# Altium PCB PCB_Func_Gen.PcbDoc
Units mm, origin at the board's own origin, x right, y up, seen from the top; angles counter-clockwise.
Board outline 91.44 x 110.49 mm, 2 copper layers (Top Layer, Bottom Layer); 54 components, 41 nets, 170 pads, 7 vias.
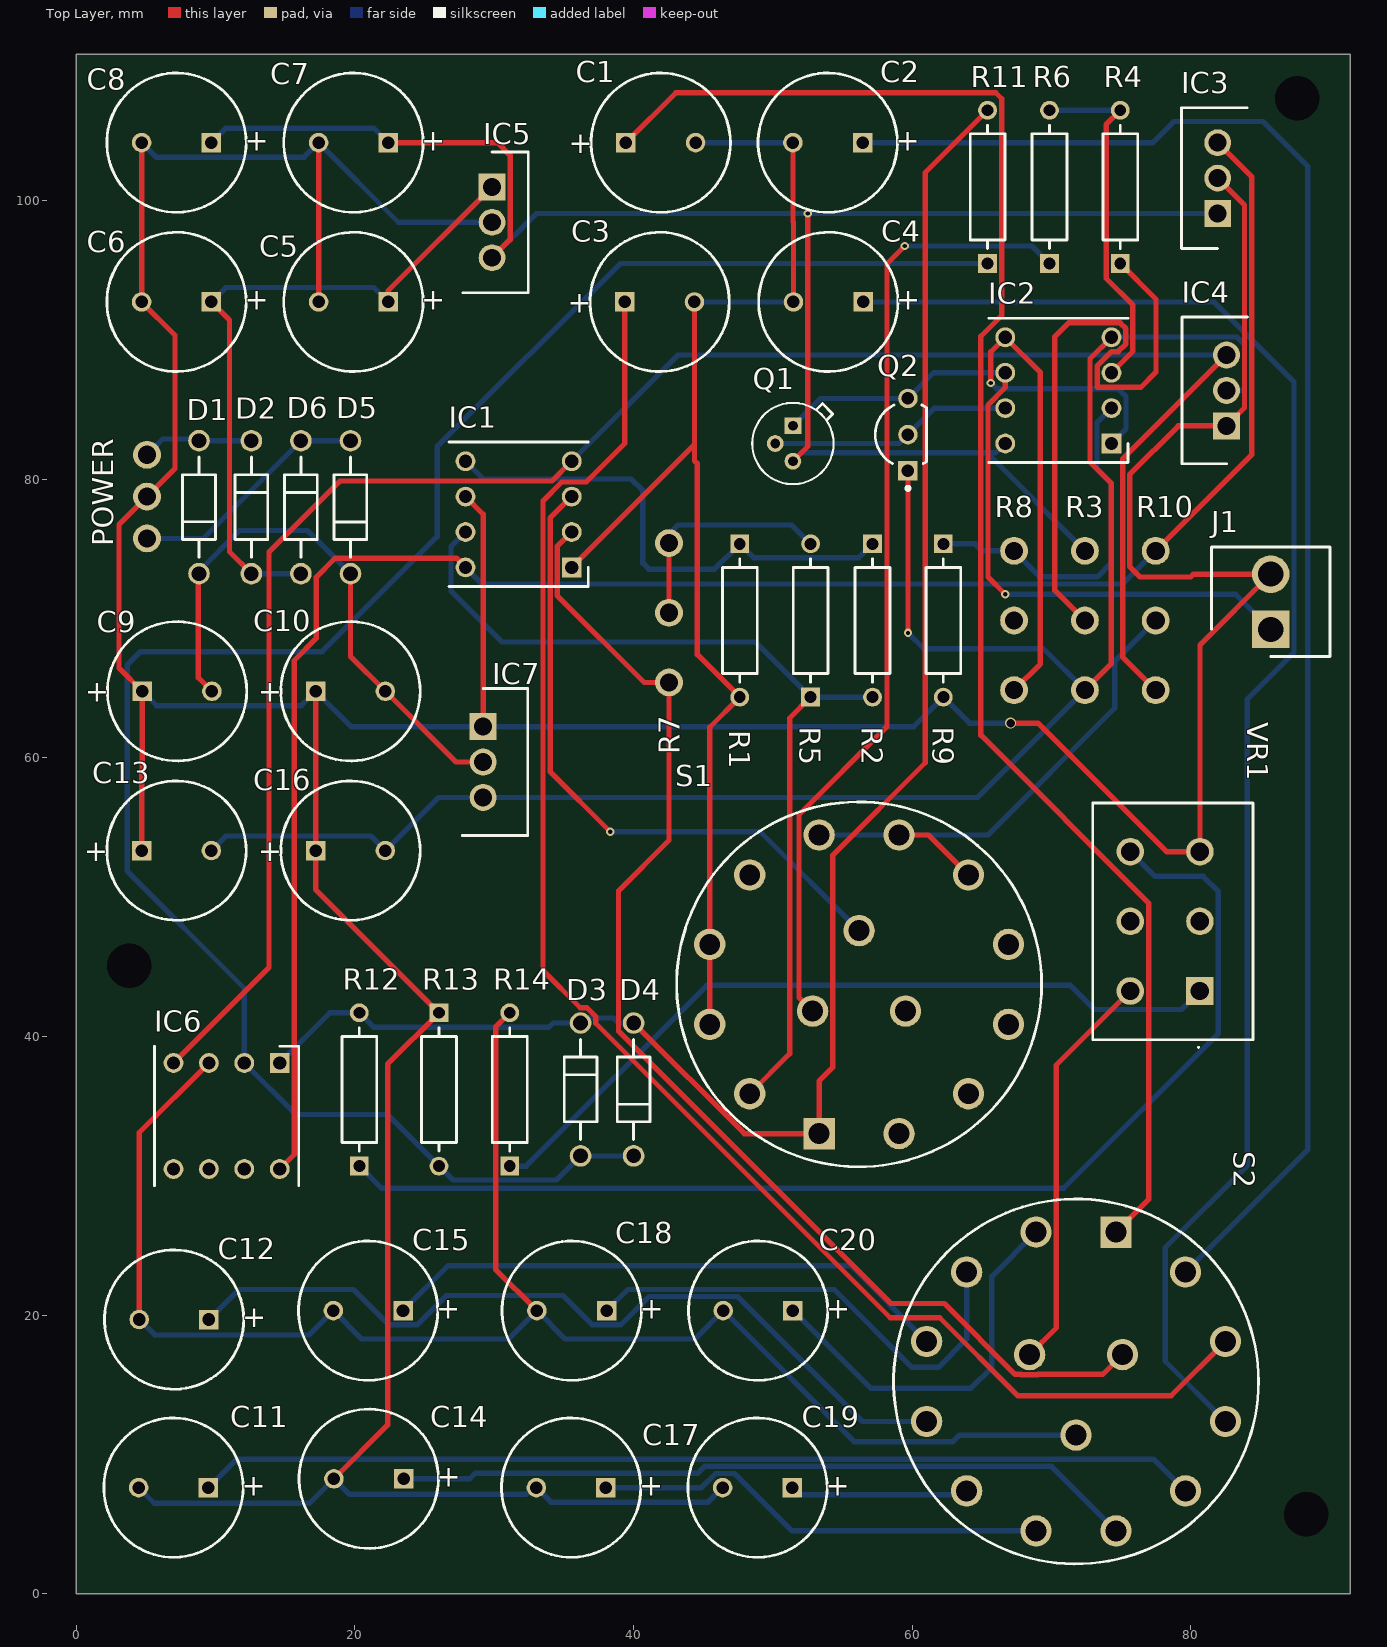
[diagram p0: Top Layer view]
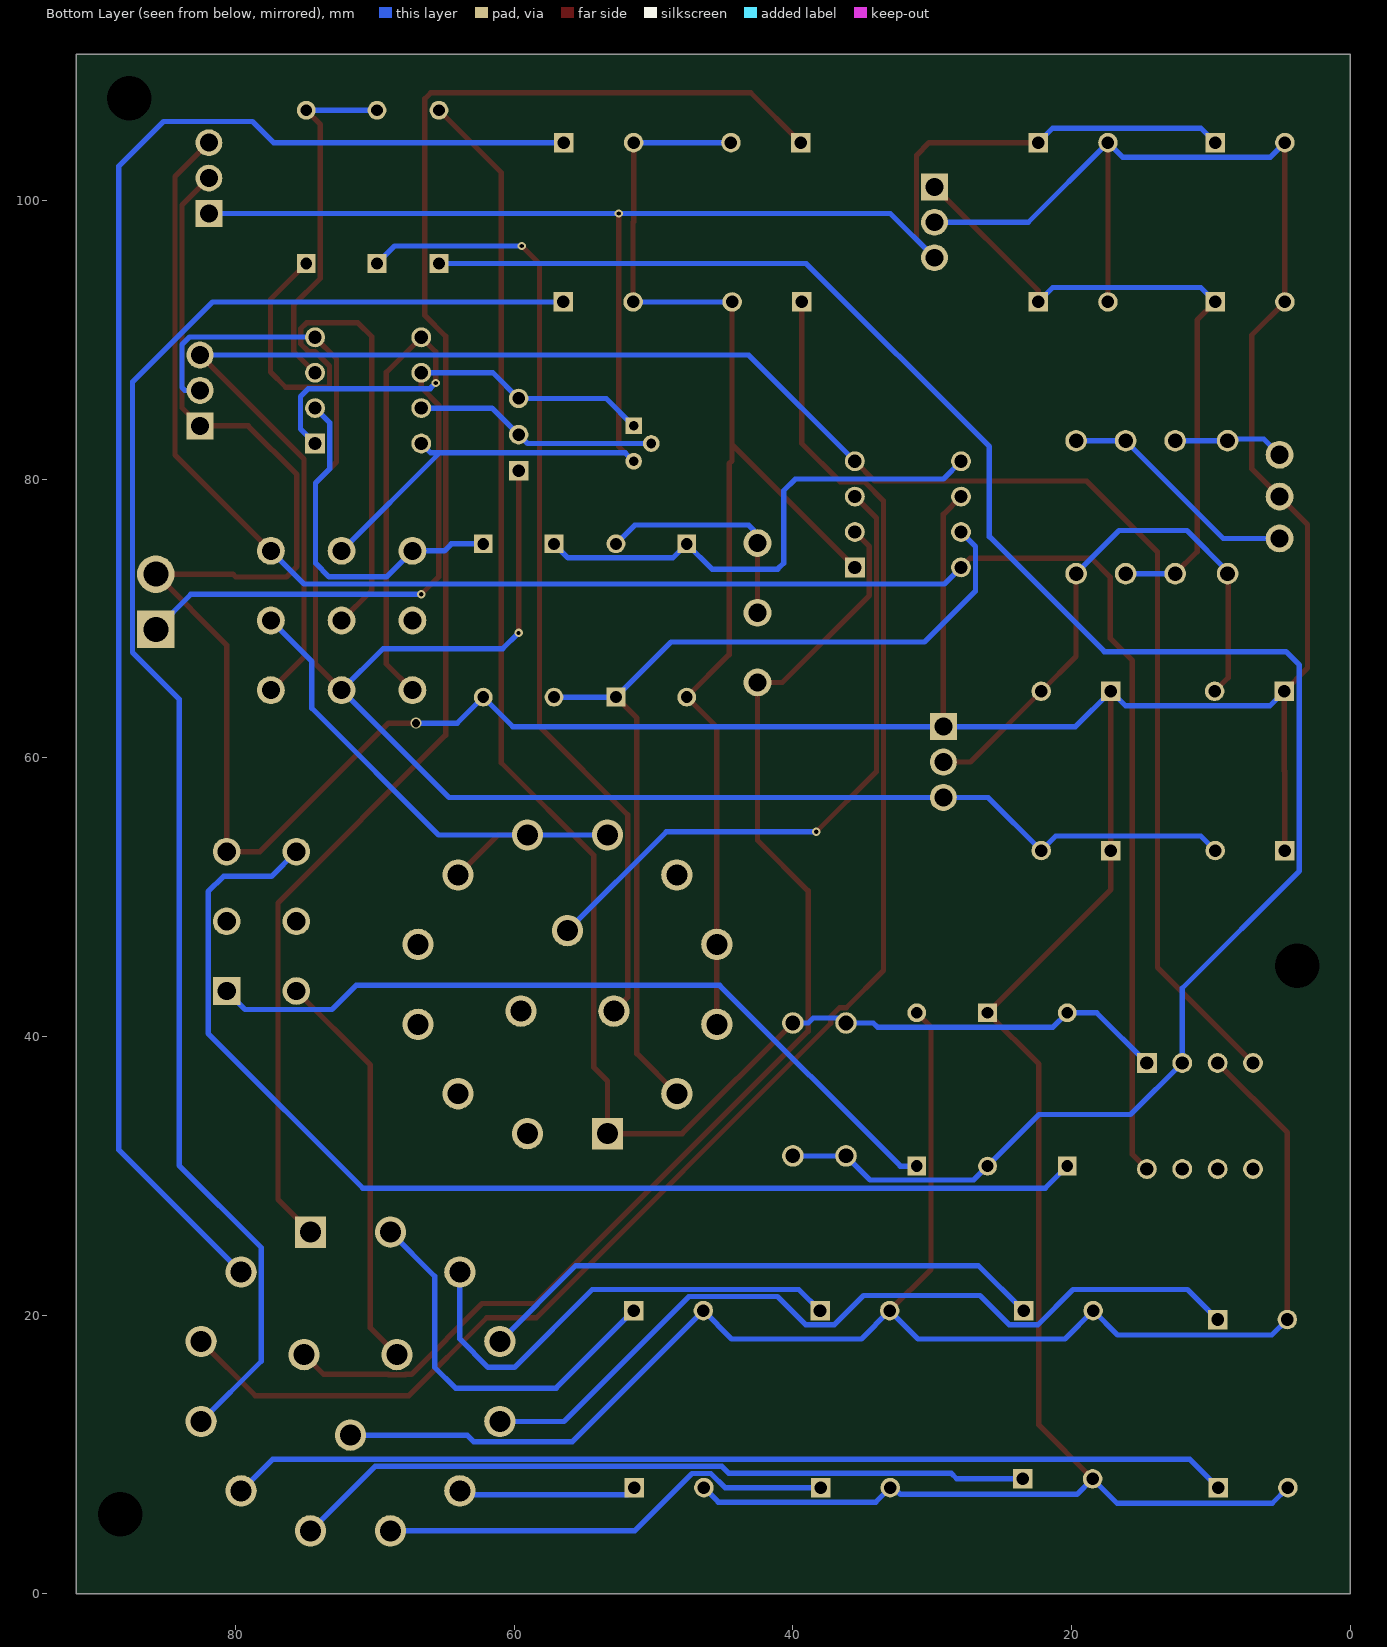
[diagram p1: Bottom Layer view, seen from below]

## Layer stack, top to bottom
Top Solder: solder mask 0.0102, Solder Resist, Dk 3.5
Top Layer: signal copper 0.0356
Dielectric 1: dielectric 0.32, FR-4, Dk 4.8
Bottom Layer: signal copper 0.0356
Bottom Solder: solder mask 0.0102, Solder Resist, Dk 3.5

## Board outline
0,0 91.44,0 91.44,110.49 0,110.49

## Design rules (kind name [scope] priority, off if disabled: settings)
BoardOutlineClearance [All] p1: gap=0.2 ignorepadtopadclearanceinfootprint=FALSE
Clearance [All] p1: gap=0.127 ignorepadtopadclearanceinfootprint=FALSE except(0.25: Arc-Hole Track-Hole SMDPad-Hole THPad-Hole Via-Hole Fill-Hole Poly-Hole Region-Hole Text-Hole)
ComponentClearance [All] p1: gap=0.127 collisioncheckmode=3 verticalgap=0.127 showdistances=TRUE
DiffPairsRouting [All] p1: maxlimit=0.254 minlimit=0.127 mostfreqgap=0.127 toplayer_minwidth=0.127 toplayer_maxwidth=25.4 toplayer_prefwidth=0.127 bottomlayer_minwidth=0.127 bottomlayer_maxwidth=25.4 bottomlayer_prefwidth=0.127 maxuncoupledlength=12.7
Height [All] p1: minheight=0 maxheight=1816.048 prefheight=12.7
HoleSize [All] p1: absolutevalues=TRUE maxlimit=6.3 minlimit=0.3 maxpercent=80.000 minpercent=20.000
HoleToHoleClearance [All] p1: gap=0.25 allowstackedmicrovias=FALSE
MinimumAnnularRing [All] p1: minimumring=0.076
MinimumSolderMaskSliver [All] p1: minsoldermaskwidth=0
PlaneClearance [All] p1: clearance=0.127
PlaneConnect PlaneConnectPowerPads [InPadClass('PowerPads')] p1: planeconnectstyle=Direct reliefexpansion=0.508 reliefentries=4 reliefconductorwidth=0.254 reliefairgap=0.254
PlaneConnect [All] p2: pad.planeconnectstyle=Relief pad.reliefexpansion=0.3 pad.reliefentries=4 pad.reliefconductorwidth=0.127 pad.reliefairgap=0.127 via.planeconnectstyle=Direct via.reliefexpansion=0.3 via.reliefentries=4 via.reliefconductorwidth=0.127 via.reliefairgap=0.127
PolygonConnect PolygonConnectPowerPads [All vs (InPadClass('PowerPads'))] p1: connectstyle=Direct reliefconductorwidth=0.254 reliefentries=4 polygonreliefangle="90 Angle" airgapwidth=0.254
PolygonConnect [All] p2: thpad.connectstyle=Relief thpad.reliefconductorwidth=0.127 thpad.reliefentries=4 thpad.polygonreliefangle="90 Angle" thpad.airgapwidth=0.127 smdpad.connectstyle=Relief smdpad.reliefconductorwidth=0.127 smdpad.reliefentries=4 smdpad.polygonreliefangle="90 Angle" smdpad.airgapwidth=0.127 via.connectstyle=Direct via.reliefconductorwidth=0.127 via.reliefentries=4 via.polygonreliefangle="90 Angle" via.airgapwidth=0.127
RoutingVias [All] p1: holewidth=0.3 width=0.6 viastyle="Through Hole" minholewidth=0.3 minwidth=0.6 maxholewidth=0.6 maxwidth=6.6
SilkToSilkClearance [All] p1: silktosilkclearance=0
SilkToSolderMaskClearance [IsPad] p1: minsilkscreentomaskgap=0.127 clearancetoexposedcopper=TRUE
SolderMaskExpansion [All] p1: expansion=0.075 istentingtop=FALSE
SupplyNets "Schematic Supply Nets_4" [InNet('+5V')] p1: voltage=0.000
SupplyNets "Schematic Supply Nets_3" [InNet('+15V')] p2: voltage=0.000
SupplyNets "Schematic Supply Nets_2" [InNet('-5V')] p3: voltage=0.000
SupplyNets "Schematic Supply Nets_1" [InNet('-15V')] p4: voltage=0.000
SupplyNets "Schematic Supply Nets" [InNet('CW1')] p5: voltage=0.000
Width [All] p1: maxlimit=25.4 minlimit=0.127 preferedwidth=0.381 minimp=50.000000 maximp=50.000000 favimp=50.000000
20 further rules are at their usual default settings.

## Components (designator, comment, footprint, x,y, rotation, side; value= is the part's Value field where it differs from the comment)
C1 "ECA-1HM221" CAPPR65-500-1250X1000X1350 41.95,104.14 r0 top value=220µF
C2 "ECA-1HM221" CAPPR65-500-1250X1000X1350 53.935,104.14 r180 top value=220µF
C3 "ECA-1HM221" CAPPR65-500-1250X1000X1350 41.87,92.71 r0 top value=220µF
C4 "ECA-1HM221" CAPPR65-500-1250X1000X1350 53.975,92.71 r180 top value=220µF
C5 "ECA-1HM221" CAPPR65-500-1250X1000X1350 19.898,92.71 r180 top value=2200uF
C6 "ECA-1HM221" CAPPR65-500-1250X1000X1350 7.198,92.71 r180 top value=0.22uF
C7 "ECA-1HM221" CAPPR65-500-1250X1000X1350 19.898,104.14 r180 top value=0.1uF
C8 "ECA-1HM221" CAPPR65-500-1250X1000X1350 7.198,104.14 r180 top value=100uF
C9 "ECA-1HM221" CAPPR65-500-1250X1000X1350 7.238,64.77 r0 top value=2200uF
C10 "ECA-1HM221" CAPPR65-500-1250X1000X1350 19.685,64.77 r0 top value=0.22uF
C11 "ECA-1HM221" CAPPR65-500-1250X1000X1350 6.985,7.62 r180 top value=220µF
C12 "ECA-1HM221" CAPPR65-500-1250X1000X1350 7.025,19.685 r180 top value=220µF
C13 "ECA-1HM221" CAPPR65-500-1250X1000X1350 7.198,53.34 r0 top value=0.1uF
C14 "ECA-1HM221" CAPPR65-500-1250X1000X1350 20.995,8.255 r180 top value=220µF
C15 "ECA-1HM221" CAPPR65-500-1250X1000X1350 20.955,20.32 r180 top value=220µF
C16 "ECA-1HM221" CAPPR65-500-1250X1000X1350 19.685,53.34 r0 top value=100uF
C17 "ECA-1HM221" CAPPR65-500-1250X1000X1350 35.52,7.62 r180 top value=220µF
C18 "ECA-1HM221" CAPPR65-500-1250X1000X1350 35.56,20.32 r180 top value=220µF
C19 "ECA-1HM221" CAPPR65-500-1250X1000X1350 48.895,7.62 r180 top value=220µF
C20 "ECA-1HM221" CAPPR65-500-1250X1000X1350 48.935,20.32 r180 top value=220µF
D1 "1N5819" ONSC-AXIAL_LEAD-2-59-10_P 8.814,77.983 r90 top
D2 "1N5819" ONSC-AXIAL_LEAD-2-59-10_P 12.572,77.978 r270 top
D3 "1N5819" ONSC-AXIAL_LEAD-2-59-10_P 36.195,36.195 r270 top
D4 "1N5819" ONSC-AXIAL_LEAD-2-59-10_P 40.005,36.195 r90 top
D5 "1N5819" ONSC-AXIAL_LEAD-2-59-10_P 19.684,77.978 r90 top
D6 "1N5819" ONSC-AXIAL_LEAD-2-59-10_P 16.128,77.978 r270 top
IC1 "TL072CP" DIPS762W70P254L1016H510Q8N 35.56,73.66 r180 top
IC2 "TL072CP" DIPS762W70P254L1016H510Q8N 74.295,82.55 r180 top
IC3 "LM7805" TO254P470X990X1900-3P 81.915,99.06 r90 top
IC4 "LM7905" TO254P470X1028X1955-3P 82.55,83.82 r90 top
IC5 "LM7815" TO254P470X990X1900-3P 29.845,100.965 r270 top
IC6 "AD826" DIPS762W70P254L1016H510Q8N 14.605,38.1 r270 top
IC7 "LM7915" TO254P470X1028X1955-3P 29.21,62.23 r270 top
J1 "B2P-VH_LF__SN_" HDRV2W114P0X396_1X2_786X850X1090P 85.725,69.215 r90 top
POWER "Transformer" TRANSFORMER 5.08,78.74 r0 top (schematic designator *1)
Q1 "2N2222AE3" FP-TO-18-MFG 51.435,82.55 r0 top
Q2 "BC557AZL1G" ONSC-TO-92-3-29-11_AM_BL 59.69,83.185 r90 top
R1 "1K" FP-RLR07-MFG 47.625,69.85 r270 top
R2 "12K" FP-RLR07-MFG 57.15,69.85 r270 top
R3 "TC33X-2-103E" BOUR-TC33X-2_V 72.39,69.85 r90 top
R4 "1K" FP-RLR07-MFG 74.93,100.965 r90 top
R5 "2.2K" FP-RLR07-MFG 52.705,69.85 r90 top
R6 "1K" FP-RLR07-MFG 69.85,100.965 r90 top
R7 "TC33X-2-103E" BOUR-TC33X-2_V 42.545,70.405 r270 top
R8 "TC33X-2-103E" BOUR-TC33X-2_V 67.31,69.85 r270 top
R9 "1K" FP-RLR07-MFG 62.23,69.85 r270 top
R10 "TC33X-2-103E" BOUR-TC33X-2_V 77.47,69.85 r270 top
R11 "10K" FP-RLR07-MFG 65.405,100.965 r90 top
R12 "2.2K" FP-RLR07-MFG 20.32,36.195 r90 top
R13 "4.7K" FP-RLR07-MFG 26.035,36.195 r270 top
R14 "2.2K" FP-RLR07-MFG 31.115,36.195 r90 top
S1 "FREQ_SELECT" SW_A30403RNCQ 56.185,43.74 r270 top
S2 "FREQ_SELECT" SW_A30403RNCQ 71.755,15.24 r90 top
VR1 "2 GANG" PDB182K220K104B 80.645,43.26 r0 top

## Footprints (in the part's own frame and the unit in brackets; to place one, negate y for a bottom-side part, rotate by r counter-clockwise, add the part's x,y. Pads: shape width x height; smd on the part's side, far side on the other; paste and mask are expansions set on the pad)
BOUR-TC33X-2_V [mm] "SMD, 3-Leads, Body 3.8x3.6mm"
  round 2 hole 1.3: 1(-5,0) 2(0,0) 3(5,0)
CAPPR65-500-1250X1000X1350 [mm] "THD, 2-Leads, Dia 10mm, Body Length 12.5mm"
  rect 1.4x1.4 hole 0.9: 1(-2.5,0)
  round 1.4 hole 0.9: 2(2.5,0)
  silkscreen extent -5,-5 5,5, body extent -5,-5 4.95,5, height 13.5
DIPS762W70P254L1016H510Q8N [mm]
  rect 1.425x1.425 hole 0.95: 1(0,0)
  round 1.425 hole 0.95: 2(0,-2.54) 3(0,-5.08) 4(0,-7.62) 5(7.62,-7.62) 6(7.62,-5.08) 7(7.62,-2.54) 8(7.62,0)
  silkscreen extent -1.19,-8.99 8.81,1.37, body extent -1.19,-8.89 8.81,1.27, height 4.84
FP-RLR07-MFG [mm]
  rect 1.35x1.35 hole 0.85 paste-2539.97 mask+0: 1(-5.5,0)
  round 1.35 hole 0.85 paste-2539.97 mask+0: 2(5.5,0)
  silkscreen extent -4.42,-1.25 4.42,1.25, body extent -6.27,-1.35 6.27,1.35, height 0.25
FP-TO-18-MFG [mm]
  rect 1.2x1.2 hole 0.7 paste-2539.97 mask+0: 1(0,1.27)
  round 1.2 hole 0.7 paste-2539.97 mask+0: 2(-1.27,0) 3(0,-1.27)
  silkscreen extent -2.92,-2.92 2.92,2.92, body extent -3.02,-3.02 3.02,3.02, height 0.25
HDRV2W114P0X396_1X2_786X850X1090P [mm]
  rect 2.7x2.7 hole 1.8: 1(0,0)
  round 2.7 hole 1.8: 2(3.96,0)
  silkscreen extent -1.95,-4.25 5.91,4.25, body extent -1.95,-4.25 5.91,4.25, height 10.9
ONSC-AXIAL_LEAD-2-59-10_P [mm] "AXIAL, 2-Leads, Diameter 2.35mm"
  round 1.55 hole 1.05: 1(-4.77,0) 2(4.77,0)
  silkscreen extent -3.6,-1.18 3.6,1.17, body extent -5.16,-1.17 5.16,1.17, height 2.34
ONSC-TO-92-3-29-11_AM_BL [mm] "TO, 3-Leads, Body Dia 4.7mm, Pitch 2.6mm"
  rect 1.4x1.4 hole 0.9: 1(-2.6,0)
  round 1.4 hole 0.9: 2(0,0) 3(2.6,0)
  silkscreen extent -3.97,-1.34 2.13,2.35, body extent -2.84,-1.34 2.84,2.35, height 5.33
PDB182K220K104B [mm]
  rect 1.98x1.98 hole 1.32: R11(0,0)
  round 1.98 hole 1.32: R12(0,5) R13(0,10) R21(-5,0) R22(-5,5) R23(-5,10)
  silkscreen extent -7.7,-4.1 3.8,13.5, body extent -7.62,-3.41 23.88,13.59, height 21.18
SW_A30403RNCQ [mm]
  rect 2.25x2.25 / inner round 2.25 / far side rect 2.25x2.25 hole 1.5: 1(10.72,-2.87)
  round 2.25 hole 1.5: 2(7.85,-7.85) 3(2.87,-10.72) 4(-2.87,-10.72) 5(-7.85,-7.85) 6(-10.72,-2.87) 7(-10.72,2.87) 8(-7.85,7.85) 9(-2.87,10.72) 10(2.87,10.72) 11(7.85,7.85) 12(10.72,2.87) A(1.925,-3.334) B(-3.85,0) C(1.925,3.334)
  silkscreen extent -13.09,-13.09 13.09,13.1, body extent -13.09,-13.09 13.09,13.09, height 32
TO254P470X990X1900-3P [mm]
  rect 1.92x1.92 hole 1.28: 1(0,0)
  round 1.92 hole 1.28: 2(2.54,0) 3(5.08,0)
  silkscreen extent -2.51,-2.1 7.59,2.6, body extent -2.41,-2.1 7.49,2.6, height 19
TO254P470X1028X1955-3P [mm]
  rect 1.935x1.935 hole 1.29: 1(0,0)
  round 1.935 hole 1.29: 2(2.54,0) 3(5.08,0)
  silkscreen extent -2.73,-1.5 7.81,3.2, body extent -2.54,-1.43 7.62,3.14, height 19.76
TRANSFORMER [mm]
  round 2 hole 1.3: 1(0,3) 2(0,0) 3(0,-3)

## Part data
C1 C2 C3 C4 C5 C6 C7 C8 C9 C10 C11 C12 C13 C14 C15 C16 C17 C18 C19 C20: library part CMP-001-00028-7, "Aluminum Electrolytic Capacitor, 220 uF, +/- 20%, 50 V, -40 to 85 degC, 2-Pin THD, RoHS, Bulk", Capacitor Type=Electrolytic, Case/Package=Radial, Manufacturer=Panasonic, Max Operating Temperature=85°C, Min Operating Temperature=-40°C, Package Description="2-Pin Radial Lead, Dia 10 mm, Body Length 12.5 mm", Package Quantity=200, Package Reference=CAPPR65-500-1250X1000X1350, Ripple Current=400mA, Tolerance=20%, Voltage Rating=50V, Datasheet URL=http://industrial.panasonic.com/cdbs/www-data/pdf/RDF0000/DMF0000COL68.pdf, Datasheet Version=Mar-16, Diameter=10mm, Lead Pitch=5mm, Manufacturer URL=http://www.panasonic.com/, Mounting Technology=TH, Packaging=Bulk, Pins=2, Ripple Current (AC)=400mA, RoHS Compliant=True
D1 D2 D3 D4 D5 D6: library part CMP-004-00009-2, "Low Drop Power Schottky Rectifier, 40 V, 1 A, 2-Pin DO-41, RoHS", Case/Package=DO, Forward Current=1A, Manufacturer="ON Semiconductor", Max Operating Temperature=125°C, Max Surge Current=25A, Min Operating Temperature=-65°C, Package Description="2-Pin, Axial Lead, Diameter 2.35 mm", Package Reference=AXIAL_LEAD-2-59-10, Package Version="Rev. U, 02/2005", Peak Reverse Current=1mA, Datasheet URL=http://www.onsemi.cn/pub_link/Collateral/1N5817-D.PDF, Datasheet Version="Rev. 10, 07/2006", Manufacturer URL=http://www.onsemi.com/, Mounting Technology=TH, Package URL=http://www.onsemi.cn/pub_link/Collateral/59-10.PDF, Packaging=Bulk, Pins=2, RoHS Compliant=True
IC1 IC2 IC6: library part 1-2199298-2, "Integrated Circuit", Manufacturer_Name="TE Connectivity", Mouser Part Number=571-1-2199298-2, Arrow Part Number=1-2199298-2, Arrow Price/Stock=https://www.arrow.com/en/products/1-2199298-2/te-connectivity?utm_currency=USD&region=europe, Datasheet Link=https://componentsearchengine.com/Datasheets/2/1-2199298-2.pdf, Height=5.1mm, Manufacturer_Part_Number=1-2199298-2, Mouser Price/Stock=https://www.mouser.co.uk/ProductDetail/TE-Connectivity/1-2199298-2?qs=fK8dlpkaUMtEKa4wabwOXQ%3D%3D
IC3: "Integrated Circuit", Manufacturer_Name=SEMELAB, Datasheet Link=https://pdf1.alldatasheet.com/datasheet-pdf/view/82833/FAIRCHILD/LM7805.html, Height=4.7mm, Manufacturer_Part_Number=LM7805
IC4 IC7: library part LM7905CT, "Integrated Circuit", Manufacturer_Name="Texas Instruments", Mouser Part Number=926-LM7905CT, Arrow Part Number=LM7905CT, Arrow Price/Stock=https://www.arrow.com/en/products/lm7905ct/texas-instruments?region=nac, Datasheet Link=https://www.ti.com/lit/gpn/lm79, Height=4.7mm, Manufacturer_Part_Number=LM7905CT, Mouser Price/Stock=https://www.mouser.co.uk/ProductDetail/Texas-Instruments/LM7905CT?qs=QbsRYf82W3Eiau4ggA8dIA%3D%3D
IC5: library part LM7805, "Integrated Circuit", Manufacturer_Name=SEMELAB, Datasheet Link=https://pdf1.alldatasheet.com/datasheet-pdf/view/82833/FAIRCHILD/LM7805.html, Height=4.7mm, Manufacturer_Part_Number=LM7805
J1: "Connector", Arrow Part Number=B2P-VH(LF)(SN), Manufacturer_Name="JST (JAPAN SOLDERLESS TERMINALS)", Mouser Part Number=N/A, Arrow Price/Stock=https://www.arrow.com/en/products/b2p-vh-lf-sn/jst-manufacturing?region=europe, Datasheet Link=https://datasheet.lcsc.com/szlcsc/JST-Sales-America-VHseries-socket-1-2P-pitch3-96mm-Straight-line_C160315.pdf, Height=10.9mm, Manufacturer_Part_Number=B2P-VH(LF)(SN), Mouser Price/Stock=https://www.mouser.co.uk/ProductDetail/JST-Commercial/B2P-VHLFSN?qs=QpmGXVUTftHAqi50yPzpkg%3D%3D
Q1: library part CMP-00252-99177200-1, "2N2222AE3 Bipolar (BJT) Transistor NPN 50V 800mA 500mW Through Hole TO-18", Case/Package=TO-18, Collector Base Voltage (VCBO)=75V, Collector Emitter Breakdown Voltage=50V, Collector Emitter Saturation Voltage=1V, Emitter Base Voltage (VEBO)=6V, Max Collector Current=800mA, Max Junction Temperature (Tj)=200°C, Max Power Dissipation=500mW, Min Operating Temperature=-65°C, Collector Emitter Voltage (VCEO)=50V, Height=5.33mm, hFE Min=100, Max Operating Temperature=200°C, Mount="Through Hole", NexarPartId=99177200, Number of Elements=1, Number of Pins=3, Packaging=Bulk, Power Dissipation=500mW, Radiation Hardening=No, RoHS=Compliant
Q2: library part CMP-1048-01514-1, "Amplifier Transistor, PNP Silicon, 3-Pin TO-92, Pb-Free, Ammo Box", Manufacturer="On Semiconductor", ComponentLink1Description="Manufacturer URL", ComponentLink1URL=http://www.onsemi.com/, ComponentLink2Description=Datasheet, ComponentLink2URL=http://www.onsemi.com/pub_link/Collateral/BC556B-D.PDF, ComponentLink3Description="Package Specification", ComponentLink3URL=http://www.onsemi.com/pub_link/Collateral/MAC97-D.PDF, DatasheetVersion="Rev. 3", IC Continuous (A)=-0.1, Mounting Technology="Through Hole", PackageDescription="3-Pin Transistor Outline, Body 4.825 x 3.685 mm, Pitch 1.27 mm", PackageReference=TO-92-3-29-11_AM_BL, PackageVersion="Rev. AM", Packing="Ammo Box", PartNumber=BC557AZL1G, Polarity=PNP, RoHS=TRUE
R1 R2 R4 R5 R6 R9 R11 R12 R13 R14: library part CMP-00030-42769933-1, "RLR07C15R0FSB14 Res Metal Film 15 Ohm 1% 1/4W ±100ppm/°C 0.001% Conformal AXL Thru-Hole Bulk", Case/Package=Conformal, Max Operating Temperature=150°C, Max Power Dissipation=250mW, Min Operating Temperature=-65°C, Resistance=15Ω, Temperature Coefficient=100ppm/°C, Tolerance=1%, Composition="Metal Film", Contact Plating="Lead, Tin", Diameter=2.29mm, Failure Rate=0.001%, Features="Military, Moisture Resistant, Weldable", Lead Free="Contains Lead", Length=7.62mm, Military Standard=MIL-PRF-39017, Mount="Through Hole", NexarPartId=42769933, Number of Terminations=2, Packaging=Bulk, Power Rating=250mW, RoHS=Compliant, Schedule B=8533210090, Termination=Axial, Width=2.29mm
R3 R7 R8 R10: library part CMP-009-00060-3, "Trimming Potentiometer, 10000 Ohm, -40 to 100 degC, 3-Pin SMD, RoHS, Tape and Reel", Case/Package=TC33X-2, Manufacturer=Bourns, Max Operating Temperature=120°C, Min Operating Temperature=-40°C, Package Description="3-Pin Surface Mount Device, Body 3.8 x 3.6 mm", Package Quantity=2500, Power=100mW, Resistance=10k, Tolerance=25%, Composition=Potentiometer, Datasheet URL=http://www.bourns.com/docs/Product-Datasheets/TC33.pdf, Datasheet Version=Aug-16, Manufacturer URL=http://www.bourns.com/, Mounting Technology=SM, Package Reference=TC33X-2, Packaging=TapeandReel, RoHS Compliant=True
S1 S2: library part A30403RNCQ, "Rotary Switch 4 Position 3P4T 2.5A (AC), 350mA (DC) 125 VAC Panel Mount, Through Hole", Package=None, Check_prices=https://www.snapeda.com/parts/A30403RNCQ/C%2526K/view-part/?ref=eda, MF=C&K, MP=A30403RNCQ, SnapEDA_Link=https://www.snapeda.com/parts/A30403RNCQ/C%2526K/view-part/?ref=snap
VR1: library part PDB182-K220K-104B, "Variable Resistor", Manufacturer_Name=Bourns, Mouser Part Number=652-PDB182-K220K104B, Arrow Part Number=PDB182-K220K-104B, Arrow Price/Stock=https://www.arrow.com/en/products/pdb182-k220k-104b/bourns?utm_currency=USD&region=nac, Datasheet Link=https://www.bourns.com/docs/Product-Datasheets/PDB18.pdf, Height=21mm, Manufacturer_Part_Number=PDB182-K220K-104B, Mouser Price/Stock=https://www.mouser.co.uk/ProductDetail/Bourns/PDB182-K220K-104B?qs=Ivs1Be2ZGq5w5ayg3Iig0w%3D%3D

## Free pads (board coordinates)
  round 0 hole 3.2 unplated: 2(3.81,45.085) 2(87.63,107.315) 2(88.265,5.715)

## Via types
v1: diameter 0.6, hole 0.3, Top Layer to Bottom Layer, 6 vias
v2: diameter 0.8, hole 0.6, Top Layer to Bottom Layer, 1 vias

## Nets (pads, with @x,y where several pads share a name; then routed paths per layer and width w, separated by ;. In a path a pad name is that pad's centre, name@x,y a point inside that pad or via, vN(x,y) a via of type N, cw(c..) or ccw(c..) an arc to the next point about the centre after c; other vN are vias at no path point)
+5V: IC1.8 IC3.3 IC6.8 R10.1 | length 139.3
  Top Layer w0.381: IC6.8 15.646,31.521 15.646,66.98 17.221,68.555 17.221,72.949 18.593,74.32 27.28,74.32 IC1.8 ; R10.1@77.47,74.85 84.353,81.733 84.353,101.702 IC3.3
  Bottom Layer w0.381: IC1.8 29.126,72.474 75.094,72.474 R10.1@77.47,74.85
+15V: C7.1 C8.1 IC2.8 IC3.1 IC5.3 Q1.3 R3.3 | length 127.9
  Top Layer w0.381: C7.1 30.226,104.14 31.14,103.226 31.14,97.18 IC5.3 ; Q1.3 52.502,82.347 v1(52.502,99.06)
  Bottom Layer w0.381: C8.1 10.74,105.181 21.357,105.181 C7.1 ; IC5.3 33.02,99.06 v1(52.502,99.06) IC3.1 ; Q1.3 52.045,81.89 65.35,81.89 ; IC2.8 66.015,81.89 65.35,81.89 ; R3.3@72.39,74.85 65.35,81.89
-5V: IC1.4 IC4.3 IC6.4 R10.3 | length 142.2
  Top Layer w0.381: IC6.4 13.843,44.958 13.843,74.778 18.923,79.858 34.138,79.858 IC1.4 ; R10.3@77.47,64.85 75.094,67.226 75.094,81.444 IC4.3
  Bottom Layer w0.381: IC1.4 43.18,88.9 IC4.3
-15V: C13.2 C16.2 IC2.4 IC4.2 IC7.3 Q2.1 R3.1 | length 136
  Top Layer w0.381: v1(59.69,68.961) Q2.1 ; R3.1@72.39,64.85 74.27,66.73 74.27,79.705 72.757,81.218 72.757,88.632 IC2.4
  Bottom Layer w0.381: C13.2 10.74,54.381 21.144,54.381 C16.2 25.995,57.15 IC7.3 64.69,57.15 72.39,64.85 69.422,67.818 60.833,67.818 v1(59.69,68.961) ; IC2.4 74.32,90.195 83.312,90.195 83.845,89.662 83.845,86.563 83.642,86.36 IC4.2
BRIDGE: C12.2 C15.2 C18.2 C20.2 IC6.3 R14.2 S2.B | length 119.4
  Top Layer w0.381: C12.2 4.525,33.1 IC6.3 ; R14.2 30.099,40.679 30.099,23.281 C18.2
  Bottom Layer w0.381: C12.2 5.643,18.567 16.702,18.567 C15.2 20.487,18.288 31.028,18.288 C18.2 35.092,18.288 44.403,18.288 C20.2 55.833,10.922 62.916,10.922 63.384,11.39 S2.B
CAP_SEL_1: C1.1 S2.1 | length 116.5
  Top Layer w0.381: C1.1 43.031,107.721 65.989,107.721 66.421,107.29 66.421,91.745 64.922,90.246 64.922,61.62 76.962,49.581 76.962,28.297 S2.1
CAP_SEL_2: C2.1 S2.2 | length 116.9
  Bottom Layer w0.381: C2.1 77.267,104.14 78.791,105.664 85.166,105.664 88.392,102.438 88.392,31.877 S2.2
CAP_SEL_3: C3.1 S2.3 | length 114.9
  Top Layer w0.381: C3.1 39.37,82.55 36.601,79.781 34.849,79.781 33.503,78.435 33.503,44.729 36.174,42.058 36.648,42.058 37.287,41.418 37.287,40.944 58.42,19.812 61.976,19.812 67.564,14.224 78.589,14.224 S2.3
CAP_SEL_4: C4.1 S2.4 | length 113.5
  Bottom Layer w0.381: C4.1 81.661,92.71 87.393,86.978 87.393,67.547 84.049,64.204 84.049,30.734 78.156,24.841 78.156,16.689 S2.4
CAP_SEL_5: C11.1 S2.5 | length 71.9
  Bottom Layer w0.381: C11.1 11.519,9.654 77.341,9.654 S2.5
CAP_SEL_6: C14.1 S2.6 | length 53.4
  Bottom Layer w0.381: C14.1 28.245,8.255 28.651,8.661 44.616,8.661 45.1,9.146 69.999,9.146 S2.6
CAP_SEL_7: C17.1 S2.7 | length 33
  Bottom Layer w0.381: C17.1 44.882,7.62 45.899,8.638 47.242,8.638 51.36,4.52 S2.7
CAP_SEL_8: C19.1 S2.8 | length 12.8
  Bottom Layer w0.381: C19.1 51.903,7.112 63.627,7.112 S2.8
CAP_SEL_9: C12.1 S2.9 | length 59.8
  Bottom Layer w0.381: C12.1 11.684,21.844 19.896,21.844 22.437,19.302 24.472,19.302 26.582,21.412 34.933,21.412 37.042,19.302 39.078,19.302 41.113,21.338 47.473,21.338 56.44,12.37 S2.9
CAP_SEL_10: C15.1 S2.10 | length 41.2
  Bottom Layer w0.381: C15.1 26.681,23.546 55.599,23.546 S2.10
CAP_SEL_11: C18.1 S2.11 | length 34.4
  Bottom Layer w0.381: C18.1 39.586,21.846 54.405,21.846 59.995,16.256 61.874,16.256 63.905,18.287 S2.11
CAP_SEL_12: C20.1 S2.12 | length 28.2
  Bottom Layer w0.381: C20.1 56.998,14.757 64.211,14.757 65.71,16.256 65.71,22.785 S2.12
CCW1: R14.1 VR1.R11 | length 56.2
  Bottom Layer w0.381: R14.1 32.295,30.695 45.263,43.663 71.349,43.663 73.076,41.935 79.32,41.935 VR1.R11@80.645,43.26
CCW2: S2.C VR1.R21 | length 29.1
  Top Layer w0.381: S2.C 70.333,19.077 70.333,37.948 VR1.R21@75.645,43.26
CW1: C5.2 C6.2 C7.2 C8.2 C9.1 C10.1 C11.2 C13.1 C14.2 C16.1 C17.2 C19.2 IC1.6 IC3.2 IC4.1 IC5.2 IC7.1 J1.2 POWER.2 R9.2 R13.1 VR1.R13 | length 368.9
  Top Layer w0.381: C13.1 4.698,59.03 4.738,59.07 C9.1 3.073,66.435 3.073,76.733 POWER.2 7.087,80.747 7.087,90.322 C6.2 C8.2 ; C10.1 C16.1 17.185,50.545 R13.1 22.352,38.012 22.352,12.112 C14.2 ; C5.2 C7.2 ; IC1.6 29.21,77.47 IC7.1 ; v2(67.056,62.484) 69.022,62.484 78.246,53.26 80.645,53.26 80.645,68.095 J1.2 80.188,73.175 79.987,72.974 76.352,72.974 75.602,73.724 75.602,80.327 79.096,83.82 IC4.1 83.845,85.115 83.845,99.67 IC3.2
  Bottom Layer w0.381: C11.2 5.603,6.502 16.742,6.502 C14.2 19.613,7.137 32.287,7.137 32.77,7.62 C17.2 34.061,6.579 45.354,6.579 C19.2 ; C8.2 5.74,103.099 16.357,103.099 C7.2 23.113,98.425 IC5.2 ; C9.1 5.78,63.729 16.144,63.729 C10.1 19.725,62.23 IC7.1 60.11,62.23 R9.2 64.096,62.484 v2(67.056,62.484)
CW2: R12.1 VR1.R23 | length 84.6
  Bottom Layer w0.381: R12.1 21.907,29.108 70.866,29.108 81.966,40.208 81.966,50.394 80.874,51.486 77.419,51.486 VR1.R23@75.645,53.26
Net*1_1: D1.2 D2.1 POWER.1 | length 7.9
  Bottom Layer w0.381: POWER.1 6.215,82.875 D1.2@8.762,82.875 ; D1.2 10.714,82.753 10.719,82.748 D2.1
Net*1_3: D5.2 D6.1 POWER.3 | length 17.5
  Bottom Layer w0.381: POWER.3 9.12,75.74 D6.1 D5.2
NetC5_1: C5.1 C6.1 D2.2 D6.2 IC5.1 | length 49.2
  Top Layer w0.381: C6.1 10.998,91.41 10.998,74.782 D2.2 ; C5.1 22.398,93.518 IC5.1
  Bottom Layer w0.381: C6.1 10.74,93.751 21.357,93.751 C5.1 ; D2.2 D6.2
NetC9_2: C9.2 C10.2 D1.1 D5.1 IC7.2 | length 41
  Top Layer w0.381: D1.1@8.762,73.335 8.762,65.746 C9.2 ; D5.1 19.684,67.271 C10.2 27.265,59.69 IC7.2
  Bottom Layer w0.381: D1.1@8.762,73.335 11.729,76.302 16.591,76.302 D5.1
NetD3_2: D3.2 D4.1 IC6.2 R11.1 R13.2 | length 141.6
  Bottom Layer w0.381: D4.1 38.075,31.425 D3.2 34.463,29.693 27.037,29.693 R13.2 22.338,34.392 15.773,34.392 IC6.2 12.065,43.459 3.658,51.867 3.658,66.65 4.623,67.615 17.653,67.615 25.908,75.87 25.908,82.321 39.052,95.465 R11.1
NetIC2_1: IC2.1 IC2.5 R8.3 | length 44.8
  Top Layer w0.381: v1(65.634,86.893) 65.634,89.129 IC2.5 69.19,87.655 69.19,66.73 R8.3
  Bottom Layer w0.381: v1(65.634,86.893) 66.04,86.487 74.778,86.487 75.336,85.928 75.336,83.591 IC2.1
NetIC2_2: IC2.2 R8.1 R9.1 | length 25.4
  Bottom Layer w0.381: R9.1 64.516,75.35 65.016,74.85 67.31,74.85 69.178,72.982 73.287,72.982 74.27,73.965 74.27,79.705 73.254,80.721 73.254,84.049 IC2.2
NetIC2_3: IC2.3 R4.2 R6.2 | length 25.8
  Top Layer w0.381: IC2.3 75.833,89.168 75.833,92.492 73.914,94.411 73.914,105.449 R4.2
  Bottom Layer w0.381: R6.2 R4.2
NetIC2_6: IC2.6 J1.1 Q1.1 Q2.3 | length 53.8
  Top Layer w0.381: v1(66.675,71.73) 65.43,72.974 65.43,85.319 66.675,86.563 IC2.6
  Bottom Layer w0.381: Q1.1 53.4,85.785 Q2.3 61.535,87.63 IC2.6 ; v1(66.675,71.73) 83.21,71.73 J1.1
NetIC2_7: IC2.7 Q1.2 Q2.2 | length 17.6
  Bottom Layer w0.381: Q1.2 59.055,82.55 Q2.2 61.595,85.09 IC2.7
NetR3_2: R3.2 R4.1 | length 45.8
  Top Layer w0.381: R3.2 70.231,72.009 70.231,90.221 71.222,91.211 74.915,91.211 75.325,90.801 75.325,89.687 74.778,89.14 74.295,89.14 73.265,88.11 73.265,86.614 73.29,86.589 76.403,86.589 77.495,87.681 77.495,92.9 R4.1
NetR5_2: R5.2 R7.1 R7.2 | length 16.7
  Top Layer w0.381: R7.2 R7.1
  Bottom Layer w0.381: R7.1 42.855,75.715 42.855,76.383 43.18,76.708 51.347,76.708 R5.2
NetR10_2: R10.2 S1.6 S1.7 S1.8 | length 38.7
  Top Layer w0.381: S1.7 61.165,54.46 S1.8
  Bottom Layer w0.381: S1.6 S1.7 65.433,54.46 74.524,63.551 74.524,66.904 R10.2
SELECTED_MODE: R6.1 S1.A | length 69.4
  Top Layer w0.381: S1.A 51.867,42.799 51.867,55.905 58.191,62.23 58.191,95.453 v1(59.461,96.723)
  Bottom Layer w0.381: v1(59.461,96.723) 68.592,96.723 R6.1
SINE_OUT: D3.1 D4.2 IC6.1 R11.2 R12.2 S1.1 | length 122.8
  Top Layer w0.381: D4.2 47.95,33.02 S1.1 53.315,36.805 54.305,37.795 54.305,53.01 60.935,59.639 60.935,101.995 R11.2
  Bottom Layer w0.381: IC6.1 18.2,41.695 R12.2 21.35,40.665 33.937,40.665 34.236,40.965 D3.1 36.553,41.323 38.546,41.323 38.905,40.965 D4.2
SQ_NONINV: IC1.5 R1.1 R2.1 | length 37.1
  Bottom Layer w0.381: IC1.5 29.21,80.01 39.827,80.01 40.665,79.172 40.665,73.965 41.097,73.533 45.808,73.533 R1.1 48.629,74.346 56.146,74.346 R2.1
SQ_OUT: IC1.7 R2.2 R5.1 S1.2 | length 68.3
  Top Layer w0.381: S1.2 51.206,38.761 51.206,62.851 R5.1
  Bottom Layer w0.381: IC1.7 26.899,75.159 26.899,71.958 30.556,68.301 48.754,68.301 R5.1 R2.2
TRI_INV: IC1.2 R7.3 S2.A | length 89.1
  Top Layer w0.381: IC1.2 34.519,75.159 34.519,71.653 40.767,65.405 R7.3 42.545,54.077 38.912,50.444 38.912,40.381 58.465,20.828 62.306,20.828 67.386,15.748 67.798,15.748 67.823,15.723 69.018,15.723 69.044,15.748 73.672,15.748 S2.A
TRI_NONINV: IC1.3 S1.B | length 47.3
  Top Layer w0.381: IC1.3 34.011,77.191 34.011,59.004 v1(38.329,54.686)
  Bottom Layer w0.381: v1(38.329,54.686) 49.089,54.686 S1.B
TRI_OUT: C1.2 C2.2 C3.2 C4.2 IC1.1 R1.2 S1.3 S1.4 | length 92.1
  Top Layer w0.381: IC1.1 44.37,82.47 ; C3.2 44.37,82.47 ; S1.3 S1.4 45.465,62.19 R1.2 44.577,67.398 44.577,81.102 44.37,81.309 44.37,82.47 ; C2.2 51.435,98.465 51.475,98.425 C4.2
  Bottom Layer w0.381: C3.2 C4.2 ; C1.2 C2.2
pads on no net: IC6.5 IC6.6 IC6.7 R8.2 S1.5 S1.9 S1.10 S1.11 S1.12 S1.C VR1.R12 VR1.R22

## Text inside footprints (layer, text, board x,y; h text height)
C1: Top Overlay "+" at 35.346,103.378 h1.5
C2: Top Overlay "+" at 60.539,104.902 h1.5 r180
C3: Top Overlay "+" at 35.266,91.948 h1.5
C4: Top Overlay "+" at 60.579,93.472 h1.5 r180
C5: Top Overlay "+" at 26.502,93.472 h1.5 r180
C6: Top Overlay "+" at 13.802,93.472 h1.5 r180
C7: Top Overlay "+" at 26.502,104.902 h1.5 r180
C8: Top Overlay "+" at 13.802,104.902 h1.5 r180
C9: Top Overlay "+" at 0.634,64.008 h1.5
C10: Top Overlay "+" at 13.081,64.008 h1.5
C11: Top Overlay "+" at 13.589,8.382 h1.5 r180
C12: Top Overlay "+" at 13.629,20.447 h1.5 r180
C13: Top Overlay "+" at 0.594,52.578 h1.5
C14: Top Overlay "+" at 27.599,9.017 h1.5 r180
C15: Top Overlay "+" at 27.559,21.082 h1.5 r180
C16: Top Overlay "+" at 13.081,52.578 h1.5
C17: Top Overlay "+" at 42.124,8.382 h1.5 r180
C18: Top Overlay "+" at 42.164,21.082 h1.5 r180
C19: Top Overlay "+" at 55.499,8.382 h1.5 r180
C20: Top Overlay "+" at 55.539,21.082 h1.5 r180